# Altium PCB ESP32 PCB.PcbDoc
Units mm, origin at the board's own origin, x right, y up, seen from the top; angles counter-clockwise.
Board outline 29.05 x 62.8 mm, 2 copper layers (Top Layer, Bottom Layer); 49 components, 66 nets, 272 pads, 93 vias.
Unrouted connection lines stored in the file: 58.
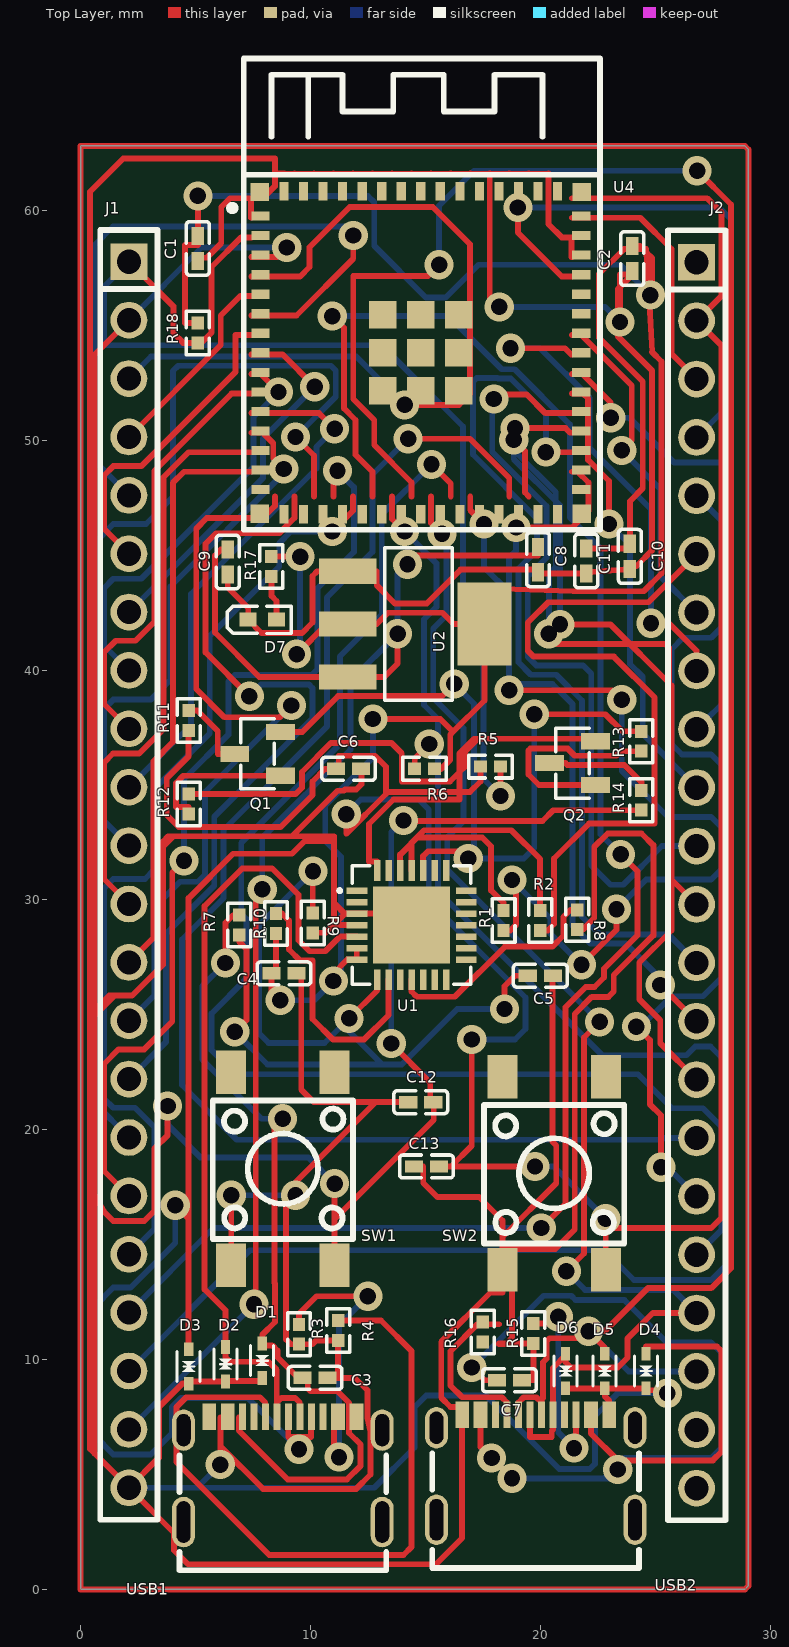
[diagram p0: Top Layer view]
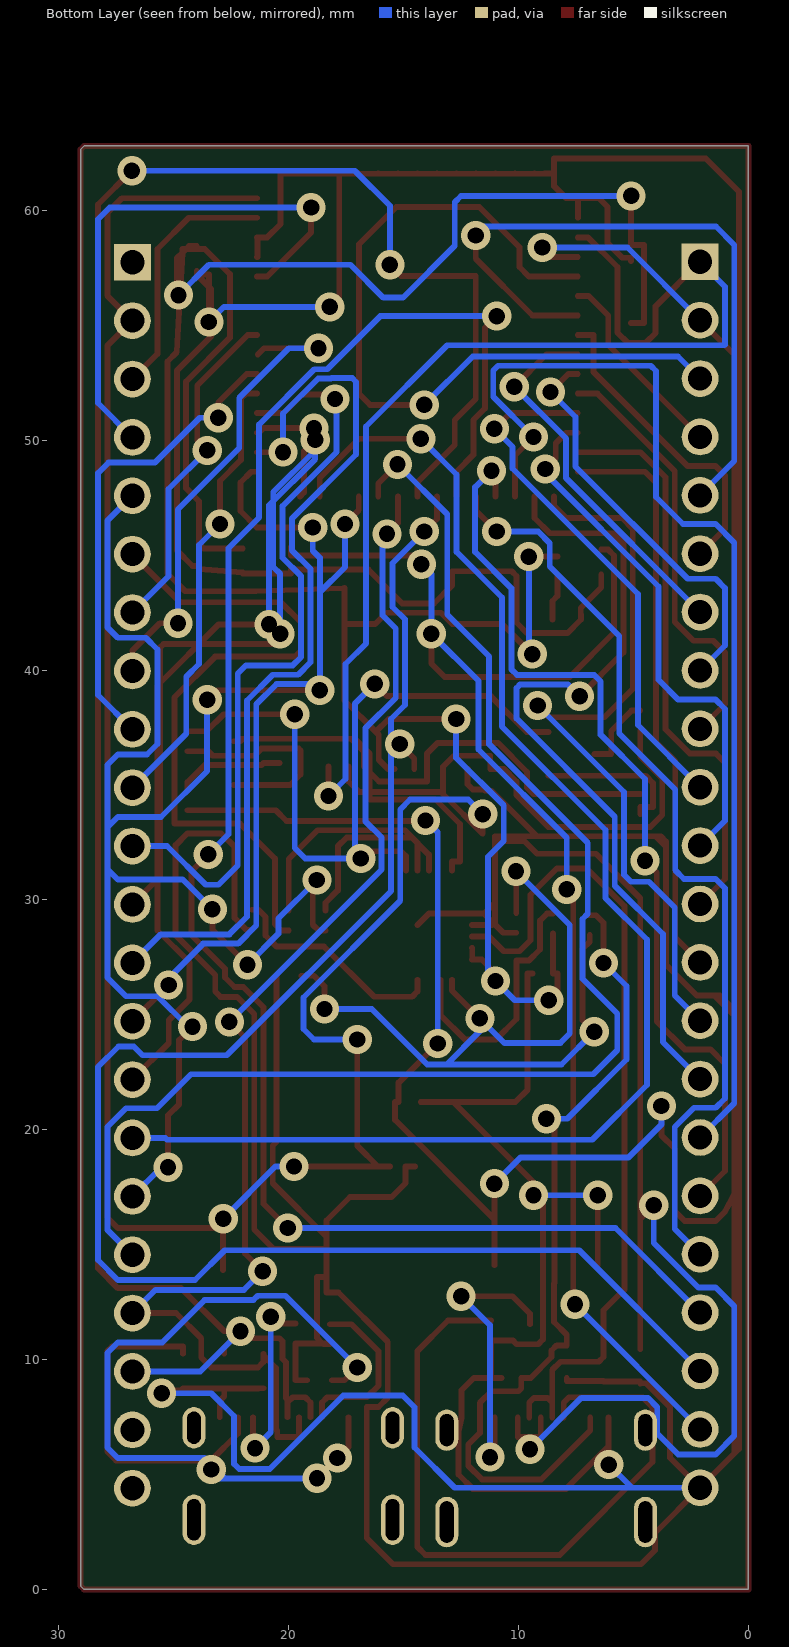
[diagram p1: Bottom Layer view, seen from below]

## Layer stack, top to bottom
Top Solder: solder mask 0.0102, Solder Resist, Dk 3.5
Top Layer: signal copper 0.0356
Dielectric 1: dielectric 0.32, FR-4, Dk 4.8
Bottom Layer: signal copper 0.0356
Bottom Solder: solder mask 0.0102, Solder Resist, Dk 3.5

## Board outline
0,0 28.902,0 29.051,0.149 29.051,62.651 28.902,62.8 0,62.8

## Design rules (kind name [scope] priority, off if disabled: settings)
Clearance Clearance_4 [All] p1: gap=0.15 ignorepadtopadclearanceinfootprint=FALSE
Clearance Clearance_3 [All] p2: gap=0.15 ignorepadtopadclearanceinfootprint=FALSE
Clearance Clearance_2 [All] p3: gap=1.5 ignorepadtopadclearanceinfootprint=FALSE
Clearance Clearance_1 [All] p4: gap=0.2 ignorepadtopadclearanceinfootprint=FALSE
Clearance [All] p5: gap=0.254 ignorepadtopadclearanceinfootprint=FALSE
PolygonConnect [All] p1: connectstyle=Relief reliefconductorwidth=0.254 reliefentries=4 polygonreliefangle="90 Angle" airgapwidth=0.254
RoutingVias [All] p1: holewidth=0.711 width=1.27 viastyle="Through Hole" minholewidth=0.711 minwidth=1.27 maxholewidth=0.711 maxwidth=1.27
SolderMaskExpansion [All] p1: expansion=0.102 istentingtop=FALSE
SupplyNets "Schematic Supply Nets_5" [InNet('VCC_3V3')] p1: voltage=0.000
SupplyNets "Schematic Supply Nets_4" [InNet('GND')] p2: voltage=0.000
SupplyNets "Schematic Supply Nets_3" [InNet('VBUS')] p3: voltage=0.000
SupplyNets "Schematic Supply Nets_2" [InNet('VBUSB')] p4: voltage=0.000
SupplyNets "Schematic Supply Nets_1" [InNet('VCC_5V')] p5: voltage=0.000
SupplyNets "Schematic Supply Nets" [InNet('ESP_3V3')] p6: voltage=0.000
Width [All] p1: maxlimit=0.254 minlimit=0.254 preferedwidth=0.254
30 further rules are at their usual default settings.

## Classes and differential pairs
component class "ESP32 Sheet": C1 C2 C3 C4 C5 C6 C8 C9 C10 C11 C12 C13 D1 D2 D3 D5 D6 D7 J1 J2 Q1 Q2 R1 R2 R4 R5 R6 R7 R8 R9 R10 R11 R12 R13 R14 R15 R16 R17 R18 SW1 U1 U2 U4 USB1 USB2

## Components (designator, comment, footprint, x,y, rotation, side; value= is the part's Value field where it differs from the comment)
C1 "10uF/25V(20%)" C0402 5.1,58.345 r90 top value=100nF
C2 "0.1uF/50V(10%)" C0402 24,57.9 r90 top value=100nF
C3 "100nF/50V" C0402 10.2,9.2 r0 top value=100nF
C4 "10uF/25V(20%)" C0402 8.845,26.8 r0 top value=100nF
C5 "1uF/16V(10%)" C0402 20,26.7 r0 top value=100nF
C6 "1uF/16V(10%)" C0402 11.655,35.7 r0 top value=100nF
C7 "100nF/50V" C0402 18.655,9.1 r0 top value=100nF
C8 "0.1uF/50V(10%)" C0402 19.9,44.8 r90 top value=100nF
C9 "0.1uF/50V(10%)" C0402 6.4,44.7 r90 top value=100nF
C10 "0.1uF/50V(10%)" C0402 23.9,44.945 r90 top value=100nF
C11 "0.1uF/50V(10%)" C0402 22,44.745 r90 top value=100nF
C12 "0.1uF/50V(10%)(NC)" C0402 14.8,21.2 r0 top value=100nF
C13 "0.1uF/50V(10%)(NC)" C0402 15.045,18.4 r0 top value=100nF
D1 "LESD5D5.0CT1G" SOD-523_L1.2-W0.8-LS1.6-BI 7.9,9.95 r90 top
D2 "LESD5D5.0CT1G" SOD-523_L1.2-W0.8-LS1.6-BI 6.3,9.8 r90 top
D3 "LESD5D5.0CT1G" SOD-523_L1.2-W0.8-LS1.6-BI 4.7,9.7 r90 top
D4 "LESD5D5.0CT1G" SOD-523_L1.2-W0.8-LS1.6-BI 24.6,9.5 r90 top
D5 "LESD5D5.0CT1G" SOD-523_L1.2-W0.8-LS1.6-BI 22.8,9.5 r90 top
D6 "LESD5D5.0CT1G" SOD-523_L1.2-W0.8-LS1.6-BI 21.1,9.5 r90 top
D7 "RED LED" LED0402-R-RD 7.9,42.2 r0 top
J1 "X6511WV-22H-C60D30" HDR-TH_22P-P2.54-V-M 2.1,31.09 r270 top
J2 "X6511WV-22H-C60D30" HDR-TH_22P-P2.54-V-M 26.8,31.07 r270 top
Q1 "L8050QLT1G" SOT-23-3_L2.9-W1.3-P1.90-LS2.4-BR 7.7,36.35 r0 top
Q2 "L8050QLT1G" SOT-23-3_L2.9-W1.3-P1.90-LS2.4-BR 21.4,35.95 r0 top
R1 "0(1%)" R0402 18.4,29.1 r90 top value=10kΩ
R2 "0(1%)" R0402 19.993,29.1 r90 top value=10kΩ
R3 "5K1" R0402 9.5,11.1 r90 top value=10kΩ
R4 "5K1" R0402 11.2,11.267 r90 top value=10kΩ
R5 "10k(1%)" R0402 17.833,35.8 r0 top value=10kΩ
R6 "10k(1%)" R0402 14.967,35.7 r0 top value=10kΩ
R7 "22.1K(1%)" R0402 6.9,28.9 r90 top value=10kΩ
R8 "10K(1%)(NC)" R0402 21.6,29.133 r90 top value=10kΩ
R9 "47.5K(1%)" R0402 10.1,29 r90 top value=10kΩ
R10 "1K(1%)" R0402 8.5,28.967 r90 top value=10kΩ
R11 "0(1%)" R0402 4.7,37.8 r90 top value=10kΩ
R12 "10K(1%)" R0402 4.7,34.167 r90 top value=10kΩ
R13 "10K(1%)" R0402 24.4,36.9 r90 top value=10kΩ
R14 "0(1%)" R0402 24.4,34.333 r90 top value=10kΩ
R15 "5K1" R0402 19.7,11.133 r90 top value=10kΩ
R16 "5K1" R0402 17.5,11.2 r90 top value=10kΩ
R17 "5.1k(1%)" R0402 8.3,44.5 r90 top value=10kΩ
R18 "0(1%)" R0402 5.1,54.667 r90 top value=10kΩ
SW1 "PTS645SL50SMTR92LFS" KEY-SMD_4P-L6.0-W6.0-P4.50-LS9.0 8.8,18.3 r90 top
SW2 "PTS645SL50SMTR92LFS" KEY-SMD_4P-L6.0-W6.0-P4.50-LS9.0 20.6,18.1 r90 top
U1 "CP2102N-A02-GQFN28" QFN-28_L5.0-W5.0-P0.50-TL-EP3.3 14.4,28.9 r0 top
U2 "SGM2212-3.3XKC3G/TR" SOT-223-3_L6.5-W3.4-P2.30-LS7.0-BR 14.6,42 r180 top
U4 "2.4GHz" BULETM-SMD_ESP32-S3-MINI-1-N8 14.8,53.8 r0 top
USB1 "2171790001" USB-C-SMD_2171790001 8.8,4.2 r0 top
USB2 "2171790001" USB-C-SMD_2171790001 19.8,4.3 r0 top

## Footprints (in the part's own frame and the unit in brackets; to place one, negate y for a bottom-side part, rotate by r counter-clockwise, add the part's x,y. Pads: shape width x height; smd on the part's side, far side on the other; paste and mask are expansions set on the pad)
BULETM-SMD_ESP32-S3-MINI-1-N8 [mm]
  rect 0.8x0.4 smd paste+0 mask+0.05: 1(-6.975,5.95) 2(-6.975,5.1) 3(-6.975,4.25) 4(-6.975,3.4) 5(-6.975,2.55) 6(-6.975,1.7) 7(-6.975,0.85) 8(-6.975,0) 9(-6.975,-0.85) 10(-6.975,-1.7) 11(-6.975,-2.55) 12(-6.975,-3.4) 13(-6.975,-4.25) 14(-6.975,-5.1) 15(-6.975,-5.95) 31(6.975,-5.95) 32(6.975,-5.1) 33(6.975,-4.25) 34(6.975,-3.4) 35(6.975,-2.55) 36(6.975,-1.7) 37(6.975,-0.85) 38(6.975,0) 39(6.975,0.85) 40(6.975,1.7) 41(6.975,2.55) 42(6.975,3.4) 43(6.975,4.25) 44(6.975,5.1) 45(6.975,5.95)
  rect 0.4x0.8 smd paste+0 mask+0.05: 16(-5.95,-7.025) 17(-5.1,-7.025) 18(-4.25,-7.025) 19(-3.4,-7.025) 20(-2.55,-7.025) 21(-1.7,-7.025) 22(-0.85,-7.025) 23(0,-7.025) 24(0.85,-7.025) 25(1.7,-7.025) 26(2.55,-7.025) 27(3.4,-7.025) 28(4.25,-7.025) 29(5.1,-7.025) 30(5.95,-7.025) 46(5.95,7.025) 47(5.1,7.025) 48(4.25,7.025) 49(3.4,7.025) 50(2.55,7.025) 51(1.7,7.025) 52(0.85,7.025) 53(0,7.025) 54(-0.85,7.025) 55(-1.7,7.025) 56(-2.55,7.025) 57(-3.4,7.025) 58(-4.25,7.025) 59(-5.1,7.025) 60(-5.95,7.025)
  rect 0.8x0.8 smd paste+0 mask+0.05: GND(-7,-7) GND(-7,7) GND(7,-7) GND(7,7)
  rect 1.2x1.2 smd paste+0 mask+0.05: GND(-1.65,-1.65) GND(-1.65,0) GND(-1.65,1.65) GND(0,-1.65) GND(0,0) GND(0,1.65) GND(1.65,-1.65) GND(1.65,0) GND(1.65,1.65)
  silkscreen extent -8.34,-7.7 7.8,12.8, body extent -7.7,-7.58 7.7,12.92, height 2.55
C0402 [mm]
  rect 0.79x0.54 smd paste-100 mask+0.051: 1(-0.545,0) 2(0.545,0)
  silkscreen extent -1.17,-0.5 1.17,0.5, body extent -0.8,-0.33 0.8,0.33, height 0.53
HDR-TH_22P-P2.54-V-M [mm]
  rect 1.6x1.6 hole 1.05: 1(-26.67,0)
  round 1.6 hole 1.05: 2(-24.13,0) 3(-21.59,0) 4(-19.05,0) 5(-16.51,0) 6(-13.97,0) 7(-11.43,0) 8(-8.89,0) 9(-6.35,0) 10(-3.81,0) 11(-1.27,0) 12(1.27,0) 13(3.81,0) 14(6.35,0) 15(8.89,0) 16(11.43,0) 17(13.97,0) 18(16.51,0) 19(19.05,0) 20(21.59,0) 21(24.13,0) 22(26.67,0)
  silkscreen extent -28.06,-1.25 28.06,1.25, body extent -27.94,-1.25 27.94,1.25, height 3
KEY-SMD_4P-L6.0-W6.0-P4.50-LS9.0 [mm]
  rect 1.9x1.3 smd: 1(-4.2,2.25) 2(4.2,2.25) 3(-4.2,-2.25) 4(4.2,-2.25)
  silkscreen extent -3.05,-3.05 2.98,3.05, body extent -3.84,-2.95 3.67,3.05, height 4.7
LED0402-R-RD [mm]
  rect 0.75x0.6 smd: 1(0.623,0) 2(-0.623,0)
  silkscreen extent -1.51,-0.61 1.26,0.58, body extent -0.8,-0.4 0.8,0.4, height 0.53
QFN-28_L5.0-W5.0-P0.50-TL-EP3.3 [mm]
  rect 0.905x0.28 smd paste-100 mask+0.051: 1(-2.377,1.5) 2(-2.377,1) 3(-2.377,0.5) 4(-2.377,0) 5(-2.377,-0.5) 6(-2.377,-1) 7(-2.377,-1.5) 15(2.377,-1.5) 16(2.377,-1) 17(2.377,-0.5) 18(2.377,0) 19(2.377,0.5) 20(2.377,1) 21(2.377,1.5)
  rect 0.28x0.905 smd paste-100 mask+0.051: 8(-1.5,-2.377) 9(-1,-2.377) 10(-0.5,-2.377) 11(0,-2.377) 12(0.5,-2.377) 13(1,-2.377) 14(1.5,-2.377) 22(1.5,2.377) 23(1,2.377) 24(0.5,2.377) 25(0,2.377) 26(-0.5,2.377) 27(-1,2.377) 28(-1.5,2.377)
  rect 3.35x3.35 smd paste-100 mask+0.051: 29(0,0)
  silkscreen extent -3.2,-2.58 2.58,2.58, body extent -2.46,-2.5 2.54,2.5, height 1
R0402 [mm]
  rect 0.566x0.54 smd paste-100 mask+0.051: 1(-0.433,0) 2(0.433,0)
  silkscreen extent -0.94,-0.5 0.94,0.5, body extent -0.5,-0.5 0.5,0.5, height 0.36
SOD-523_L1.2-W0.8-LS1.6-BI [mm]
  rect 0.6x0.4 smd paste+0 mask+0.051: 1(-0.75,0) 2(0.75,0)
  silkscreen extent -0.65,-0.5 0.65,0.5, body extent -0.85,-0.45 0.85,0.45, height 0.76
SOT-23-3_L2.9-W1.3-P1.90-LS2.4-BR [mm]
  rect 1.25x0.7 smd: 1(1,-0.95) 2(1,0.95) 3(-1,0)
  silkscreen extent -0.73,-1.53 0.73,1.53, body extent -1.42,-1.5 1.42,1.5, height 1.2
SOT-223-3_L6.5-W3.4-P2.30-LS7.0-BR [mm]
  rect 2.5x1.1 smd: 1(2.97,-2.3) 2(2.97,0) 3(2.97,2.3)
  rect 2.34x3.6 smd: 4(-2.97,0)
  silkscreen extent -1.57,-3.33 1.37,3.33, body extent -3.66,-3.25 3.71,3.25, height 1.8
USB-C-SMD_2171790001 [mm]
  oval 1x2.2 hole 0.6 slot 1.8 at 90 deg paste-2539.97 mask+0.05: 1(-4.32,-1.271)
  oval 1x1.8 hole 0.6 slot 1.4 at 90 deg paste-2539.97 mask+0.05: 1(-4.32,2.728) 1(4.32,2.728)
  oval 1x2.2 hole 0.6 slot 1.8 at 90 deg copper offset 0,0 paste-2539.97 mask+0.05: 1(4.32,-1.271)
  rect 0.6x1.15 smd paste-100 mask+0.05: A1B12(-3.2,3.303) A4B9(-2.4,3.303) B1A12(3.2,3.303) B4A9(2.4,3.303)
  rect 0.3x1.15 smd paste-100 mask+0.05: A5(-1.25,3.303) A6(-0.25,3.303) A7(0.25,3.303) A8(1.25,3.303) B5(1.75,3.303) B6(0.75,3.303) B7(-0.75,3.303) B8(-1.75,3.303)
  silkscreen extent -4.5,-3.37 4.5,1.62, body extent -4.47,-4.06 4.47,3.84, height 3.23

## Part data
C1 C2 C3 C4 C5 C6 C7 C8 C9 C10 C11 C12 C13: library part CL05B104KB54PNC, JLCPCB Part Class="Basic Part", LCSC Part Name="100nF ±10% 50V", Manufacturer=SAMSUNG(三星), Tolerance=±10%, Add into BOM=yes, Convert to PCB=yes, Datasheet=https://atta.szlcsc.com/upload/public/pdf/source/20160218/1457707763339.pdf, Device=CL05B104KB54PNC, Manufacturer Part=CL05B104KB54PNC, Supplier=LCSC, Supplier Footprint=0402, Supplier Part=C307331, Symbol=CL05B104KB54PNC
D1 D2 D3 D4 D5 D6: library part LESD5D5.0CT1G_C5199850, JLCPCB Part Class="Extended Part", Manufacturer=UMW(友台半导体), Add into BOM=Yes, Contributor=lcsc, Convert to PCB=Yes, Manufacturer Part=LESD5D5.0CT1G, spicePre=D, spiceSymbolName=LESD5D5.0CT1G_C5199850, Supplier=LCSC, Supplier Part=C5199850
D7: library part 16-213SDRC/S530-A3/TR8, Emitted Color=Red, Forward Current=20mA, Forward Voltage (VF)=2V, JLCPCB Part Class="Extended Part", LCSC Part Name=红灯, Lens Color="Colorless transparent lens", Manufacturer=EVERLIGHT(亿光), Add into BOM=yes, Convert to PCB=yes, Datasheet=https://atta.szlcsc.com/upload/public/pdf/source/20180423/C71911_C51F85E8EEDEC443F292EE02E8E26750.pdf, Device=16-213SDRC/S530-A3/TR8, Dominant Wavelength=639nm, Luminous Intensity=43mcd, Manufacturer Part=16-213SDRC/S530-A3/TR8, Peak Wavelength=650nm, Supplier=LCSC, Supplier Footprint=0402, Supplier Part=C71911, Symbol=16-213/SDRC/S530-A3/TR8, Viewing Angle=120°
J1 J2: Color=Black, Current Rating=3A, JLCPCB Part Class="Extended Part", LCSC Part Name="1x22P 间距:2.54mm 方针", Manufacturer="XKB Connection(中国星坤)", Operating Temperature=-40℃~+105℃, Voltage Rating (Max)=250V, Add into BOM=yes, Circluar Pins/Square Pins=Policy, Contact Material=Brass, Contact Plating=Gold, Convert to PCB=yes, Datasheet=https://atta.szlcsc.com/upload/public/pdf/source/20221108/2FDDF9C694C8EDC81165E23F2EAAE597.pdf, Device=X6511WV-22H-C60D30, Insulation Height=2.5mm, Length of End Connection Pin=-, Length of Mating Pin=-, Manufacturer Part=X6511WV-22H-C60D30, Number of Pins=22P, Number of Rows="Single Row", Pin Structure=1x22P, Pitch=2.54mm, Row Spacing=2.54mm, Supplier=LCSC, Supplier Footprint=插件,P=2.54mm, Supplier Part=C725954, Symbol=X6511WV-22H-C30D60
Q1 Q2: Collector Cut-Off Current (Icbo)=150nA, Collector-Emitter Saturation Voltage (VCE(sat)@Ic,Ib)=500mV@800mA,80mA, DC Current Gain (hFE@Ic,Vce)=100@100mA,1V, JLCPCB Part Class="Extended Part", LCSC Part Name="NPN 电流:800mA 耐压:25V", Manufacturer=LRC(乐山无线电), Operating Temperature=-55℃~+150℃, Add into BOM=yes, Convert to PCB=yes, Datasheet=https://atta.szlcsc.com/upload/public/pdf/source/20150518/1457707314424.pdf, Device=L8050QLT1G, Manufacturer Part=L8050QLT1G, Supplier=LCSC, Supplier Footprint=SOT-23, Supplier Part=C49581, Symbol=L8050QLT1G
R1 R2 R3 R4 R5 R6 R7 R8 R9 R10 R11 R12 R13 R14 R15 R16 R17 R18: library part AC0402FR-0710KL, JLCPCB Part Class="Extended Part", LCSC Part Name="厚膜电阻 10kΩ ±1% 62.5mW", Manufacturer=YAGEO(国巨), Operating Temperature Range=-55℃~+155℃, Temperature Coefficient=±100ppm/℃, Tolerance=±1%, Add into BOM=yes, Convert to PCB=yes, Datasheet=https://atta.szlcsc.com/upload/public/pdf/source/20180927/C229861_4ABDC471507C1ED6AFB4BA66AFC8620A.pdf, Device=AC0402FR-0710KL, Manufacturer Part=AC0402FR-0710KL, Supplier=LCSC, Supplier Footprint=0402, Supplier Part=C144807, Symbol=AC0402FR-0710KL, Type="Thick Film Resistors"
SW1 SW2: Contact Current=50mA, JLCPCB Part Class="Extended Part", LCSC Part Name="6*6*1.55mm 立贴 轻触开关", Manufacturer=C&K, Operating Force=130gf, Operating Temperature=-40℃~+85℃, Voltage Rating (DC)=12V, Actuator Style="Round Button", Add into BOM=yes, Circuit=SPST, Convert to PCB=yes, Datasheet=https://atta.szlcsc.com/upload/public/pdf/source/20190108/C285530_E89B379DE8DD14E424006A6061D0203A.pdf, Device=PTS645SL50SMTR92LFS, Manufacturer Part=PTS645SL50SMTR92LFS, Mechanical Life=-, Mounting Style="Brick nogging", Pin Style="Gull Wing", Supplier=LCSC, Supplier Footprint=SMD, Supplier Part=C221877, Switch Height=1.55mm, Switch Length=6mm, Switch Width=6mm, Symbol=PTS645SL50SMTR92LFS, With Lamp=-
U1: JLCPCB Part Class="Extended Part", Manufacturer="SKYWORKS/SILICON LABS(芯科)", Operating Temperature=-40℃~+85℃@(Ta), Voltage - Supply=3V~3.6V, Add into BOM=yes, Applications Function="USB to UART", Convert to PCB=yes, Datasheet=https://atta.szlcsc.com/upload/public/pdf/source/20201204/C964632_F2B790CC23A72455AEF523510305B30A.pdf, Device=CP2102N-A02-GQFN28, LCSC Part Name=CP2102N-A02-GQFN28, Manufacturer Part=CP2102N-A02-GQFN28, Protocol=-, Supplier=LCSC, Supplier Footprint=QFN-28-EP(5x5), Supplier Part=C1550553, Symbol=CP2102N-A02-GQFN28
U2: library part SGM2212-3.3XKC3G/TR_C3294699, JLCPCB Part Class="Extended Part", Manufacturer=SGMICRO(圣邦微), Add into BOM=yes, Convert to PCB=yes, Device=SGM2212-3.3XKC3G/TR_C3294699, LCSC Part Name=SGM2212-3.3XKC3G/TR, Manufacturer Part=SGM2212-3.3XKC3G/TR, Supplier=LCSC, Supplier Footprint=SOT-223-3, Supplier Part=C3294699, Symbol=SGM2212-3.3XKC3G/TR_C3294699
U4: library part ESP32-S3-MINI-1-N8, JLCPCB Part Class="Extended Part", Manufacturer=ESPRESSIF(乐鑫), Operating Temperature=-, Output Power=20.5dBm, Add into BOM=yes, Antenna Type=-, Convert to PCB=yes, Core Processor="ESP32-S3FN8 Chip", Datasheet=https://atta.szlcsc.com/upload/public/pdf/source/20220425/7F117D7A09F85946280540FD9EFDF9F3.pdf, Device=ESP32-S3-MINI-1-N8, LCSC Part Name=ESP32-S3-MINI-1-N8, Manufacturer Part=ESP32-S3-MINI-1-N8, Operating Voltage=-, Receive  Current=-, Send  Current=-, Sensitivity=-, Supplier=LCSC, Supplier Footprint=SMD, Supplier Part=C2913206, Support Interface=I2C；GPIO；SPI；PWM；ADC；UART；USB；I2S, Symbol=ESP32-S3-MINI-1-N8, Wireless Standard=-
USB1 USB2: JLCPCB Part Class="Extended Part", Manufacturer=MOLEX, Add into BOM=yes, Convert to PCB=yes, Datasheet=https://www.molex.com/content/dam/molex/molex-dot-com/products/automated/en-us/salesdrawingpdf/217/217179/2171790001_sd.pdf?inline\, Device=2171790001, LCSC Part Name=2171790001, Manufacturer Part=2171790001, Supplier=LCSC, Supplier Footprint=SMD, Supplier Part=C3197684, Symbol=2171790001

## Via types
v1: diameter 1.27, hole 0.711, Top Layer to Bottom Layer, 93 vias

## Nets (pads, with @x,y where several pads share a name; then routed paths per layer and width w, separated by ;. In a path a pad name is that pad's centre, name@x,y a point inside that pad or via, vN(x,y) a via of type N, cw(c..) or ccw(c..) an arc to the next point about the centre after c; other vN are vias at no path point)
ESP_3V3: J1.1 R5.2 R18.1 U4.3 | length 50.2
  Top Layer w0.254: J1.1 4.033,55.827 4.033,54.661 4.46,54.234 R18.1 5.245,54.234 5.69,54.679 5.69,57.531 6.984,58.825 7.425,58.825 ; v1(18.266,34.516) R5.2
  Bottom Layer w0.254: J1.1 1.016,56.676 1.016,54.153 1.041,54.127 13.104,54.127 16.637,50.594 16.637,41.148 17.526,40.259 17.526,35.255 v1(18.266,34.516)
GND: C1.1 C2.1 C3.2 C4.2 C5.2 C6.2 C7.2 C8.1 C9.1 C10.1 C11.1 C12.1 C13.1 D1.1 D2.1 D3.1 D4.1 D5.1 D6.1 D7.2 J1.22 R3.1 R4.1 R8.1 R9.1 R15.1 R16.1 SW1.1 SW2.1 U1.3 U1.29 U2.1 U4.1 U4.2 U4.42 U4.43 U4.46 U4.47 U4.48 U4.49 U4.50 U4.51 U4.52 U4.53 U4.54 U4.55 U4.56 U4.57 U4.58 U4.59 U4.60 USB1.A1B12 USB1.B1A12 USB2.A1B12 USB2.B1A12 | length 375.7
  Top Layer w0.254: D3.1 D3.1@4.7,8.966 ; C1.1 5.1,57.937 5.486,57.937 6.121,58.572 6.121,60.147 6.499,60.525 7.417,60.525 ; v1(6.071,5.428) 6.08,5.437 6.08,6.231 ; 6.08,7.475 6.08,6.231 ; C9.1 6.4,43.586 7.29,42.697 D7.2 7.283,42.2 7.283,42.194 7.872,41.605 9.627,41.605 10.084,42.062 10.084,44.094 10.289,44.3 U2.1 12.88,44.3 12.88,43.688 13.672,42.896 15.06,42.896 16.531,44.367 19.9,44.367 C8.1 19.9,44.2 C11.1 22,44.247 C10.1 23.9,44.526 24.181,44.526 24.864,45.21 24.864,53.023 23.368,54.519 23.368,56.569 23.472,56.673 ; SW1.1 v1(6.55,17.146) ; 7.425,59.675 7.417,59.675 7.417,60.525 ; D1.1 7.9,9.068 6.3,9.068 D2.1 6.3,9.048 4.7,9.048 D3.1@4.7,8.966 ; 9.3,61.6 9.3,61.595 ; v1(9.347,17.146) v1@9.068,17.425 ; C4.2 9.601,26.8 9.601,21.742 10.144,21.2 12.843,21.2 ; R9.1 10.668,28.567 11.501,29.4 ; 10.15,61.6 10.15,61.595 ; C3.2 11.2,9.2 ; 11,61.6 11,61.595 ; 11.85,61.6 11.85,61.595 ; C6.2 12.217,35.7 12.217,35.027 11.989,34.798 11.506,34.798 11.453,34.745 11.176,34.745 9.197,32.766 ; 12.7,61.6 12.7,61.595 ; 13.55,61.6 13.55,61.595 ; C12.1 12.843,21.2 ; U1.29 13.9,29.4 U1.3 11.501,29.4 ; 14.4,61.6 14.4,61.595 ; C13.1 14.91,18.4 14.91,17.678 15.519,17.069 17.334,17.069 18.35,16.053 18.35,15.327 ; 15.25,61.6 15.25,61.595 ; 16.1,61.6 16.1,61.595 ; 16.95,61.6 16.95,61.595 ; 17.8,61.6 17.8,61.595 ; v1(18.211,55.799) 17.8,56.21 17.8,61.595 ; 18.65,61.6 18.65,61.595 ; C7.2 19.7,9.1 R15.1 18.524,10.7 ; 19.5,61.6 19.5,61.595 ; 20.35,61.6 20.35,61.595 ; C5.2 20.523,26.7 20.523,19.482 20.692,19.313 20.692,17.669 18.35,15.327 ; D6.1 21.311,8.75 21.324,8.738 D5.1@22.8,8.738 ; 21.375,57.975 21.361,57.975 21.361,58.825 ; 21.375,58.825 21.361,58.825 ; R8.1 21.844,28.7 22.35,29.206 22.35,32.309 22.931,32.891 24.407,32.891 24.917,32.38 24.917,28.454 23.195,26.731 23.195,26.01 22.965,25.779 22.243,25.779 21.5,25.036 21.5,15.658 20.65,14.808 SW2.1@18.35,14.808 ; D5.1 D5.1@22.8,8.738 ; USB2.B1A12@23,7.487 23,8.204 22.8,8.404 D5.1@22.8,8.738 ; v1(23.47,55.143) 23.472,55.146 23.472,56.673 ; C2.1 C2.1@24,57.201 ; D4.1 D4.1@24.6,8.738 ; v1(25.527,8.534) 25.4,8.661 24.6,8.661 D4.1@24.6,8.738 ; 0.406,6.114 0.406,24.994 ; 0.406,6.114 0.61,5.91 ; 0.406,6.114 0.61,6.114 ; 0.406,24.994 0.406,60.808 1.854,62.255 8.45,62.255 8.45,61.6 ; 0.406,24.994 1.245,25.832 1.473,25.832 ; 0.61,5.91 0.61,6.114 ; 0.61,5.91 J1.22 ; 0.61,6.114 0.61,24.968 1.473,25.832 ; 1.473,25.832 2.235,25.832 ; J1.22 4.064,2.456 4.064,1.702 4.674,1.092 15.457,1.092 16.6,2.235 16.6,7.487 16.6,7.937 16.092,7.937 15.688,8.341 15.688,10.77 17.833,12.915 18.35,12.915 SW2.1@18.35,13.589 ; J1.22 3.404,5.724 3.404,7.925 4.445,8.966 D3.1@4.7,8.966 ; 2.235,25.832 3.581,27.178 ; 2.235,25.832 3.581,27.178 ; 3.581,27.178 3.581,32.309 ; 3.581,32.309 3.581,32.537 3.81,32.766 4.038,32.766 ; 3.581,32.309 4.038,32.766 ; 4.038,32.766 9.197,32.766 ; 6.08,6.231 7.937,4.374 11.989,4.374 12.613,4.998 12.613,6.875 12.48,7.475 12.48,8.661 11.941,9.2 11.2,9.2 ; 7.417,60.525 7.425,60.525 7.925,60.525 8.45,61.05 8.45,61.6 ; 8.45,61.6 8.86,61.6 8.865,61.595 9.3,61.595 ; v1@9.068,17.425 12.843,21.2 ; v1@9.068,17.425 8.941,17.297 8.941,17.146 8.941,10.87 9.144,10.667 R3.1 10.084,10.667 10.251,10.834 11.2,10.834 11.2,9.2 ; 9.197,32.766 11.021,32.766 11.021,29.87 11.492,29.4 11.501,29.4 ; 9.3,61.595 10.15,61.595 ; 10.15,61.595 11,61.595 ; 11,61.595 11.85,61.595 ; 11.85,61.595 12.7,61.595 ; 12.7,61.595 13.55,61.595 ; 13.55,61.595 14.4,61.595 ; 14.4,61.595 15.25,61.595 ; 15.25,61.595 16.1,61.595 ; 16.1,61.595 16.95,61.595 ; 16.95,61.595 17.8,61.595 ; 17.8,61.595 18.65,61.595 ; SW2.1@18.35,13.589 18.771,13.589 18.771,10.947 18.524,10.7 ; SW2.1@18.35,13.589 SW2.1 SW2.1@18.35,14.808 ; SW2.1@18.35,14.808 18.35,15.327 ; 18.524,10.7 18.491,10.667 18.2,10.667 18.2,10.7 18.524,10.7 ; 18.65,61.595 19.5,61.595 ; 19.5,61.595 20.35,61.595 ; 20.35,61.595 20.35,59.405 20.93,58.825 21.361,58.825 ; D5.1@22.8,8.738 D4.1@24.6,8.738 ; 23.472,56.673 23.472,57.201 C2.1@24,57.201 ; 23.472,56.673 C2.1@24,57.201
  Bottom Layer w0.254: J1.22 5.063,4.42 ; v1(6.071,5.428) 5.063,4.42 ; v1(6.55,17.146) v1(9.347,17.146) ; v1(18.211,55.799) 22.814,55.799 v1(23.47,55.143) ; v1(25.527,8.534) 23.368,8.534 22.375,7.541 22.375,5.461 22.149,5.235 20.826,5.235 17.628,8.433 15.037,8.433 14.529,7.925 14.529,6.172 12.777,4.42 5.063,4.42
NetC5_1: C5.1 R7.1 R9.2 U1.8 | length 39.2
  Top Layer w0.254: v1(6.706,24.257) 7.211,24.763 7.211,27.861 6.9,28.172 R7.1 ; R9.2 10.1,31.233 v1(10.109,31.242) ; v1(11.681,24.841) 12.9,26.06 U1.8 ; v1(18.44,25.248) 18.44,26.243 18.898,26.7 C5.1
  Bottom Layer w0.254: v1(6.706,24.257) 8.126,22.837 13.124,22.837 ; v1(10.109,31.242) 7.772,28.905 7.772,24.181 8.179,23.774 10.614,23.774 v1(11.681,24.841) 11.681,24.28 13.124,22.837 ; v1(18.44,25.248) 16.384,25.248 13.974,22.837 13.124,22.837
NetC6_1: C6.1 C13.2 J2.2 R5.1 R11.1 SW2.3 U4.45 | length 116.4
  Top Layer w0.254: R11.1@4.7,37.367 4.7,36.247 3.749,35.296 3.749,33.691 4.267,33.173 8.702,33.173 10.084,34.555 10.084,35.154 10.63,35.7 C6.1 11.227,35.7 11.227,36.271 12.802,36.271 13.281,35.791 13.281,34.697 ; v1(11.557,33.731) 11.557,32.88 13.281,34.605 13.281,34.697 ; C13.2 16.114,18.4 ; v1(17.018,23.927) 17.018,19.304 16.114,18.4 ; R5.1 17.4,35.154 16.944,34.697 13.281,34.697 ; v1(19.766,18.4) 16.114,18.4 ; 21.375,60.525 27.257,60.525 27.889,59.893 27.889,56.289 J2.2 27.889,54.111 27.889,16.18 27.432,15.723 23.256,15.723 v1(22.85,16.129) SW2.3
  Bottom Layer w0.254: v1(11.557,33.731) 12.19,34.364 14.716,34.364 15.146,33.934 15.146,29.965 19.355,25.756 19.355,24.384 18.898,23.927 v1(17.018,23.927) ; v1(19.766,18.4) 20.579,18.4 v1(22.85,16.129)
NetC12_2: C12.2 J1.2 R14.1 SW1.3 U4.4 | length 100.2
  Top Layer w0.254: J1.2 0.61,53.73 0.61,17.17 1.016,16.434 1.422,16.027 2.769,16.027 3.2,16.459 3.2,19.177 3.785,19.761 v1(3.785,21.031) ; 7.425,57.975 8.56,57.975 v1(8.966,58.382) ; SW1.3 11.05,16.105 ; v1(11.05,17.653) 11.05,16.105 ; v1(13.513,23.749) 15.215,22.047 15.215,21.2 C12.2 15.367,21.2 15.367,20.422 11.05,16.105 ; v1(14.046,33.449) 14.067,33.429 20.091,33.429 20.563,33.9 R14.1
  Bottom Layer w0.254: J1.2 5.262,58.382 v1(8.966,58.382) ; v1(3.785,21.031) 3.785,20.218 5.207,18.796 9.907,18.796 v1(11.05,17.653) ; v1(13.513,23.749) 13.513,32.941 14.021,33.449 v1(14.046,33.449)
NetD2_2: D2.2 U1.5 USB1.A7 USB1.B7 | length 36.6
  Top Layer w0.254: 8.53,7.475 8.53,8.128 ; 9.53,7.475 9.53,8.128 9.327,8.331 8.733,8.331 8.53,8.128 ; U1.5 11.278,28.4 10.64,27.762 9.957,27.762 9.474,28.245 9.474,30.224 8.331,31.367 7.029,31.367 5.387,29.725 5.387,13.053 6.3,12.14 D2.2 6.3,10.108 6.502,9.906 8.174,9.906 8.53,9.55 8.53,8.128
NetD3_2: D3.2 U1.4 USB1.A6 USB1.B6 | length 59.4
  Top Layer w0.254: v1(4.115,16.713) 4.7,16.128 ; D3.2 4.7,16.128 ; 9.03,7.475 9.03,6.623 v1@9.5,6.623 ; v1(9.5,6.096) v1@9.5,6.623 ; 10.03,7.475 10.03,6.623 v1@9.5,6.623 ; U1.4 11.151,28.9 11.024,29.027 11.024,32.56 9.754,32.56 9.197,32.004 6.629,32.004 4.7,30.075 4.7,16.128
  Bottom Layer w0.254: v1(4.115,16.713) 4.115,15.072 2.175,13.132 1.422,13.132 0.61,12.319 0.61,6.68 1.422,5.867 3.048,5.867 3.962,6.782 3.962,7.925 4.369,8.331 7.264,8.331 v1(9.5,6.096)
NetD5_2: D5.2 J2.20 U4.23 USB2.A7 USB2.B7 | length 98.8
  Top Layer w0.254: 14.4,47.55 14.4,48.158 12.771,49.787 12.771,50.881 11.862,51.791 11.862,57.15 15.113,57.15 v1(15.596,57.633) ; USB2.B7@19.05,7.487 19.05,8.128 19.279,8.357 19.821,8.357 USB2.A7@20.05,8.128 ; USB2.A7@20.05,7.487 USB2.A7@20.05,8.128 ; D5.2 22.8,10.525 v1@22.396,10.929 ; v1(26.822,61.722) 28.296,60.249 28.296,13.97 27.432,13.106 24.68,13.106 22.8,11.227 v1(22.098,11.227) v1@22.396,10.929 ; USB2.A7@20.05,8.128 20.05,8.264 20.117,8.331 20.117,9.881 20.269,10.033 20.269,10.795 20.403,10.929 v1@22.396,10.929
  Bottom Layer w0.254: v1(15.596,57.633) 15.596,60.198 17.12,61.722 v1(26.822,61.722) ; v1(22.098,11.227) 23.845,9.48 J2.20
NetD6_2: D6.2 J2.19 U4.24 USB2.A6 USB2.B6 | length 58.1
  Top Layer w0.254: 15.25,47.55 15.25,46.396 v1(15.723,45.923) ; USB2.A6@19.55,7.487 19.55,6.635 20.498,6.635 20.498,6.907 20.55,6.96 20.55,7.487 20.55,9.635 D6.2@21.1,10.185 ; D6.2 D6.2@21.1,10.185 ; v1(21.133,13.843) 21.904,14.614 21.904,24.012 v1(22.581,24.689) ; J2.19 24.898,12.02 23.8,10.922 23.8,10.084 23.368,9.652 21.336,9.652 21.1,9.888 D6.2@21.1,10.185
  Bottom Layer w0.254: v1(15.723,45.923) 15.921,45.725 15.921,42.379 15.344,41.802 15.344,38.786 16.662,37.468 16.662,33.421 15.954,32.713 15.954,31.316 v1(22.581,24.689) ; v1(21.133,13.843) 21.946,13.03 25.79,13.03 J2.19
NetD7_1: D7.1 R17.1 | length 2
  Top Layer w0.254: R17.1 8.3,43.225 8.523,43.002 D7.1
NetJ1_3: J1.3 U4.5 | length 34.8
  Top Layer w0.254: 7.425,57.125 9.55,57.125 9.957,57.531 9.957,58.395 11.707,60.145 15.319,60.145 16.942,58.522 16.942,52.019 16.459,51.537 v1(14.097,51.537)
  Bottom Layer w0.254: J1.3 3.064,53.644 11.989,53.644 v1(14.097,51.537)
NetJ1_4: J1.4 U4.6 | length 8.6
  Top Layer w0.254: J1.4 6.096,54.136 6.096,55.423 6.948,56.275 7.425,56.275
NetJ1_5: J1.5 U4.7 | length 29.7
  Top Layer w0.254: 7.425,55.425 9.388,55.425 11.862,57.899 v1(11.862,58.903)
  Bottom Layer w0.254: J1.5 0.61,49.09 0.61,58.496 1.407,59.294 11.471,59.294 v1(11.862,58.903)
NetJ1_6: J1.6 U4.8 | length 13.7
  Top Layer w0.254: J1.6 1.016,46.144 1.016,48.463 1.422,48.87 2.642,48.87 6.731,52.959 6.731,54.575 7.425,54.575
NetJ1_7: J1.7 U4.9 | length 16.5
  Top Layer w0.254: 7.425,53.725 8.788,53.725 v1(10.185,52.328)
  Bottom Layer w0.254: J1.7 7.927,48.347 7.927,50.07 v1(10.185,52.328)
NetJ1_8: J1.8 U4.10 | length 17.9
  Top Layer w0.254: 7.425,52.875 7.831,52.875 v1(8.611,52.095)
  Bottom Layer w0.254: J1.8 1.016,41.064 1.016,43.561 1.422,43.967 2.642,43.967 7.523,48.849 7.523,51.008 v1(8.611,52.095)
NetJ1_9: J1.9 U4.11 | length 18.7
  Top Layer w0.254: J1.9 1.016,38.524 1.016,40.767 1.524,41.275 2.384,41.275 3.2,42.091 3.2,48.659 6.567,52.025 7.425,52.025
NetJ1_10: J1.10 U4.12 | length 23.2
  Top Layer w0.254: 7.425,51.175 10.369,51.175 v1(11.049,50.495)
  Bottom Layer w0.254: J1.10 4.805,37.605 4.805,43.307 10.262,48.763 10.262,49.708 v1(11.049,50.495)
NetJ1_11: J1.11 U4.13 | length 23.5
  Top Layer w0.254: 7.425,50.325 7.925,50.325 8.382,49.868 8.382,49.2 v1(8.839,48.743)
  Bottom Layer w0.254: J1.11 1.016,33.444 1.016,38.303 1.422,38.71 3.048,38.71 3.912,39.573 3.912,43.632 8.839,48.559 v1(8.839,48.743)
NetJ1_12: J1.12 U4.14 | length 25
  Top Layer w0.254: J1.12 1.016,30.904 1.016,35.966 1.413,36.363 2.546,36.363 3.604,37.421 3.604,48.387 4.692,49.475 7.425,49.475
NetJ1_13: J1.13 U4.15 | length 25.3
  Top Layer w0.254: J1.13 3.177,28.357 3.177,36.027 4.013,36.863 4.013,48.143 4.496,48.625 7.425,48.625
NetJ1_14: J1.14 U4.16 | length 33.2
  Top Layer w0.254: 8.45,47.55 8.45,47.134 7.925,46.609 5.486,46.609 5.029,46.152 5.029,39.172 6.253,37.948 8.661,37.948 v1(9.169,38.456)
  Bottom Layer w0.254: J1.14 3.2,25.84 3.2,29.667 4.32,30.787 5.105,30.787 5.408,31.09 5.408,34.694 v1(9.169,38.456)
NetJ1_15: J1.15 U4.17 | length 36
  Top Layer w0.254: v1(7.341,38.862) 5.436,40.767 5.436,45.491 5.893,45.949 8.64,45.949 9.3,46.609 9.3,47.55
  Bottom Layer w0.254: J1.15 3.708,23.808 3.708,28.511 5.812,30.615 5.812,33.619 10.081,37.888 10.081,39.218 9.924,39.375 7.853,39.375 v1(7.341,38.862)
NetJ1_16: J1.16 U4.18 | length 50
  Top Layer w0.254: v1(9.347,50.14) 10.15,49.337 10.15,47.55
  Bottom Layer w0.254: J1.16 0.61,21.15 0.61,45.542 1.422,46.355 2.845,46.355 4.013,47.523 4.013,53.01 4.244,53.24 10.895,53.24 11.1,53.035 11.1,51.892 v1(9.347,50.14)
NetJ1_17: J1.17 U4.19 | length 40.6
  Top Layer w0.254: J1.17 1.016,18.204 1.016,22.862 1.649,23.495 2.769,23.495 3.985,24.711 3.985,31.188 v1(4.496,31.699) ; 11,47.55 11,48.49 v1(11.176,48.666)
  Bottom Layer w0.254: v1(4.496,31.699) 4.496,35.255 6.426,37.186 6.426,39.499 6.706,39.779 10.058,39.779 10.31,40.03 10.31,43.559 11.887,45.136 11.887,47.955 v1(11.176,48.666)
NetJ1_18: J1.18 U4.20 | length 41.2
  Top Layer w0.254: v1(10.947,46.025) 11.85,46.927 11.85,47.55
  Bottom Layer w0.254: J1.18 3.2,15.68 3.2,20.117 2.362,20.955 1.422,20.955 1.016,21.361 1.016,30.505 1.422,30.912 2.796,30.912 3.177,31.293 3.177,34.801 5.616,37.24 5.616,41.481 8.638,44.503 8.638,45.519 9.144,46.025 v1(10.947,46.025)
NetJ1_19: J1.19 U4.21 | length 78.5
  Top Layer w0.254: v1(10.947,55.397) 11.455,54.889 11.455,51.384 11.963,50.876 11.963,49.365 12.7,48.629 12.7,47.55 ; v1(20.041,15.723) 21.096,16.778 21.096,25.326 21.974,26.205 22.355,26.205 22.77,26.619 22.77,27 24.232,28.462 24.232,31.242 v1(23.495,31.979)
  Bottom Layer w0.254: J1.19 5.783,15.723 v1(20.041,15.723) ; v1(10.947,55.397) 16.013,55.397 18.322,53.088 18.883,53.088 21.285,50.686 21.285,46.634 22.619,45.3 22.619,32.854 v1(23.495,31.979)
NetJ1_20: J1.20 R6.1 U4.22 | length 74.2
  Top Layer w0.254: 13.55,47.55 13.55,46.572 v1(14.097,46.025) ; R6.1 14.534,36.15 v1(15.164,36.779)
  Bottom Layer w0.254: J1.20 7.357,14.757 22.784,14.757 24.079,13.462 27.432,13.462 28.296,14.326 28.296,22.733 27.407,23.622 26.74,23.622 26.357,23.239 22.689,23.239 15.55,30.378 v1@15.55,36.393 ; v1(14.097,46.025) 15.478,44.644 15.478,42.744 14.94,42.206 14.94,38.476 15.55,37.867 v1@15.55,36.393 ; v1(15.164,36.779) v1@15.55,36.393
NetJ2_3: J2.3 U4.44 | length 11
  Top Layer w0.254: 21.375,59.675 24.348,59.675 25.705,58.318 25.705,53.755 J2.3
NetJ2_4: J2.4 U4.41 | length 23.8
  Top Layer w0.254: v1(19.025,60.122) 19.025,59.03 20.93,57.125 21.375,57.125
  Bottom Layer w0.254: v1(19.025,60.122) 27.788,60.122 28.296,59.614 28.296,51.616 J2.4
NetJ2_5: J2.5 R1.1 | length 35.9
  Top Layer w0.254: R1.1 18.694,28.667 18.948,28.921 18.948,30.683 v1(18.771,30.861) ; v1(21.793,27.178) 23.317,28.702 v1(23.317,29.591)
  Bottom Layer w0.254: v1(18.771,30.861) 20.447,29.185 20.447,28.524 v1(21.793,27.178) ; v1(23.317,29.591) 24.613,30.886 27.432,30.886 27.889,31.344 27.889,35.865 27.432,36.322 26.162,36.322 25.705,36.779 25.705,40.894 26.213,41.402 27.432,41.402 27.889,41.859 27.889,46.491 J2.5
NetJ2_6: J2.6 R2.1 | length 30.2
  Top Layer w0.254: R2.1 20.32,28.667 20.599,28.947 20.599,31.801 22.123,33.325 24.968,33.325 24.968,38.811 23.199,40.581 19.71,40.581 19.456,40.835 19.456,42.062 20.345,42.951 24.711,42.951 J2.6
NetJ2_7: J2.7 U4.38 | length 14.9
  Top Layer w0.254: 21.375,54.575 21.777,54.575 23.975,52.377 23.975,49.985 v1(23.546,49.555)
  Bottom Layer w0.254: v1(23.546,49.555) 25.224,47.878 25.224,44.076 J2.7
NetJ2_8: J2.8 U4.37 | length 21.4
  Top Layer w0.254: v1(18.7,54) 21.073,54 21.348,53.725 ; v1(24.816,42.037) 25.603,42.037 26.8,40.84 J2.8
  Bottom Layer w0.254: v1(18.7,54) 19.99,54 22.149,51.841 22.149,49.657 24.816,46.99 v1(24.816,42.037)
NetJ2_9: J2.9 U4.36 | length 20.9
  Top Layer w0.254: 21.375,52.875 21.826,52.875 23.063,51.638 v1(23.063,50.978)
  Bottom Layer w0.254: v1(23.063,50.978) 23.868,50.978 25.823,49.022 27.838,49.022 28.296,48.565 28.296,38.916 J2.9
NetJ2_10: J2.10 U4.35 | length 19.7
  Top Layer w0.254: 21.375,52.025 21.863,52.025 22.073,51.816 22.073,49.142 22.987,48.228 v1(22.987,46.355)
  Bottom Layer w0.254: v1(22.987,46.355) 23.901,45.441 23.901,40.263 24.458,39.706 24.458,37.222 J2.10
NetJ2_11: J2.11 U4.34 | length 33.4
  Top Layer w0.254: v1(17.981,51.789) 18.175,51.983 18.958,51.983 18.969,51.994 19.401,51.994 20.22,51.175 21.375,51.175
  Bottom Layer w0.254: v1(17.981,51.789) 17.912,51.72 17.912,49.483 20.264,47.131 20.264,44.887 19.456,44.079 19.456,40.568 19.821,40.203 21.861,40.203 22.215,39.849 22.215,31.496 23.051,30.66 23.612,30.66 25.292,32.34 J2.11
NetJ2_12: J2.12 U4.33 | length 29.8
  Top Layer w0.254: v1(18.898,50.522) 21.094,50.522 21.291,50.325 21.375,50.325 ; v1(20.371,41.58) 20.371,41.125 25.448,41.125 25.603,40.97 25.603,30.997 J2.12
  Bottom Layer w0.254: v1(18.898,50.522) 18.898,49.512 20.668,47.741 20.668,44.483 20.371,44.185 v1(20.371,41.58)
NetJ2_13: J2.13 U4.32 | length 39.1
  Top Layer w0.254: v1(20.244,49.479) 20.248,49.475 21.375,49.475
  Bottom Layer w0.254: v1(20.244,49.479) 20.244,51.156 18.715,52.684 18.155,52.684 18.138,52.701 17.234,52.701 17.069,52.535 17.069,49.378 19.86,46.586 19.86,45.212 19.05,44.402 19.05,40.335 19.588,39.797 20.691,39.797 21.811,38.676 21.811,29.268 22.581,28.499 25.561,28.499 J2.13
NetJ2_14: J2.14 U4.31 | length 32.5
  Top Layer w0.254: v1(18.948,46.203) 21.387,46.203 22.098,46.914 22.098,48.158 21.631,48.625 21.375,48.625 ; v1(25.222,26.298) J2.14
  Bottom Layer w0.254: v1(18.948,46.203) 18.948,45.191 18.644,44.887 18.644,39.624 18.875,39.393 20.523,39.393 21.407,38.509 21.407,28.884 22.197,28.095 23.721,28.095 25.222,26.594 v1(25.222,26.298)
NetJ2_15: J2.15 U4.29 | length 36.3
  Top Layer w0.254: v1(18.847,50.013) 19.329,49.53 19.329,47.721 19.5,47.55 ; v1(20.853,41.986) 23.04,41.986 25.705,39.322 25.705,28.67 24.308,27.273 24.308,25.673 25.219,24.762 25.219,23.761 J2.15
  Bottom Layer w0.254: v1(18.847,50.013) 18.847,49.174 20.853,47.168 v1(20.853,41.986)
NetJ2_16: J2.16 U4.28 | length 61.5
  Top Layer w0.254: v1(14.247,50.061) 16.944,50.061 18.65,48.355 18.65,47.55
  Bottom Layer w0.254: v1(14.247,50.061) 12.695,48.509 12.695,45.141 10.714,43.159 10.714,37.536 6.216,33.038 6.216,30.074 4.412,28.27 4.412,21.941 6.793,19.56 25.289,19.56 25.368,19.64 J2.16
NetJ2_17: J2.17 U4.26 | length 42.4
  Top Layer w0.254: 16.95,47.55 16.95,46.957 v1(17.551,46.355) ; v1(18.644,39.116) 23.139,39.116 v1(23.546,38.71) ; v1(24.181,24.486) 24.765,23.901 24.765,21.107 25.248,20.625 v1(25.248,18.364)
  Bottom Layer w0.254: v1(17.551,46.355) 17.551,44.475 18.644,43.383 v1(18.644,39.116) ; v1(23.546,38.71) 23.546,35.611 25.552,33.604 27.432,33.604 27.889,33.147 27.889,26.619 27.076,25.806 25.705,25.806 24.384,24.486 v1(24.181,24.486) ; v1(25.248,18.364) 25.536,18.364 J2.17
NetJ2_18: J2.18 U4.25 | length 61
  Top Layer w0.254: v1(15.265,48.946) 16.1,48.111 16.1,47.55
  Bottom Layer w0.254: v1(15.265,48.946) 13.099,46.78 13.099,42.411 11.278,40.589 11.278,36.769 6.987,32.478 6.987,29.391 7.211,29.167 7.211,26.566 5.701,25.056 5.701,23.458 6.749,22.41 24.25,22.41 25.73,20.93 27.076,20.93 27.889,20.117 27.889,15.649 J2.18
NetQ1_1: Q1.1 R12.1 | length 6.6
  Top Layer w0.254: R12.1 4.7,34.036 4.153,34.036 4.153,35.085 4.468,35.4 Q1.1
NetQ1_2: Q1.2 R13.2 U1.24 | length 33.1
  Top Layer w0.254: Q1.2 9.639,37.3 11.201,38.862 15.723,38.862 v1(16.256,39.395) ; U1.24 14.9,31.902 15.111,32.113 16.554,32.113 v1(16.866,31.801) ; v1(19.736,38.075) 22.829,38.075 23.571,37.333 R13.2
  Bottom Layer w0.254: v1(16.256,39.395) 17.12,38.532 17.12,32.055 v1(16.866,31.801) 19.276,31.801 19.736,32.26 v1(19.736,38.075)
NetQ1_3: Q1.3 R11.2 | length 3.4
  Top Layer w0.254: R11.2 5.08,38.233 5.964,37.349 5.964,36.35 Q1.3
NetQ2_1: Q2.1 R13.1 | length 9.3
  Top Layer w0.254: Q2.1 19.939,35 19.482,35.457 19.482,36.5 19.562,36.58 21.191,36.58 21.498,36.273 23.302,36.273 23.496,36.467 R13.1
NetQ2_2: Q2.2 R12.2 U1.28 | length 31.8
  Top Layer w0.254: R12.2 9.347,34.6 9.627,34.879 9.627,35.56 10.897,36.83 13.517,36.83 13.975,36.373 13.975,35.153 16.071,35.153 16.485,35.567 ; U1.28 12.9,31.674 12.548,31.674 12.548,33.299 13.614,34.366 16.485,34.366 16.485,35.567 ; Q2.2 Q2.2@22.2,36.9 ; 16.485,35.567 16.733,35.814 16.733,36.468 17.272,37.008 ; 16.485,35.567 16.485,36.373 17.12,37.008 17.272,37.008 ; 17.272,37.008 Q2.2@21.99,37.008 ; Q2.2@21.99,37.008 22.2,37.008 Q2.2@22.2,36.9 ; Q2.2@21.99,37.008 22.098,36.9 Q2.2@22.2,36.9
NetQ2_3: Q2.3 R14.2 | length 4.7
  Top Layer w0.254: Q2.3@20.4,35.95 21.094,35.95 21.175,35.869 23.652,35.869 24.4,35.121 R14.2
NetR1_2: R1.2 U1.26 | length 8.1
  Top Layer w0.254: U1.26 13.9,31.967 14.645,32.713 17.475,32.713 17.859,32.329 17.859,30.412 18.4,29.87 R1.2
NetR2_2: R2.2 U1.25 | length 9.8
  Top Layer w0.254: U1.25 14.4,32.485 14.94,33.025 18.741,33.025 19.993,31.773 R2.2
NetR3_2: R3.2 USB1.B5 | length 13.1
  Top Layer w0.254: R3.2 9.5,11.989 10.262,12.751 v1(12.497,12.751) ; 11.03,7.475 11.03,5.967 v1(11.242,5.755)
  Bottom Layer w0.254: v1(11.242,5.755) 11.242,11.496 v1(12.497,12.751)
NetR4_2: R4.2 USB1.A5 | length 31.5
  Top Layer w0.254: 8.03,7.475 8.03,8.128 7.802,8.357 4.597,8.357 4.166,7.925 4.166,5.537 8.204,1.499 14.046,1.499 14.402,1.854 14.402,10.363 13.065,11.7 R4.2
NetR8_2: R8.2 U1.11 | length 9.9
  Top Layer w0.254: U1.11 14.4,26.01 14.629,25.781 16.281,25.781 18.465,27.965 20.523,27.965 21.006,28.447 21.006,29.261 21.311,29.566 R8.2
NetR10_2: R10.2 U1.9 | length 11.4
  Top Layer w0.254: R10.2 8.763,29.4 9.068,29.095 9.068,27.838 9.55,27.356 10.084,27.356 10.084,24.818 10.973,23.929 12.341,23.929 13.4,24.988 U1.9
NetR15_2: R15.2 USB2.B5 | length 8.6
  Top Layer w0.254: R15.2 20.481,11.566 v1(20.777,11.862) ; v1(21.463,6.147) 21.55,6.234 USB2.B5@21.55,7.487
  Bottom Layer w0.254: v1(20.777,11.862) 20.777,6.833 v1(21.463,6.147)
NetR16_2: R16.2 USB2.A5 | length 7.5
  Top Layer w0.254: 18.2,11.533 17.261,11.533 16.092,10.363 16.092,8.865 16.6,8.357 18.321,8.357 18.55,8.128 USB2.A5@18.55,7.487
NetU4_27: U4.27
NetU4_30: U4.30
NetU4_39: U4.39
NetU4_40: U4.40
VBUS: C3.1 D1.2 R7.2 USB1.A4B9 USB1.B4A9 | length 37.1
  Top Layer w0.254: v1(6.299,27.254) 6.299,29.007 6.625,29.333 R7.2 ; 6.88,7.475 6.88,6.909 9.011,4.778 11.582,4.778 12.183,5.378 12.183,6.299 11.68,6.802 11.68,7.475 11.68,8.114 11.176,8.618 10,8.618 9.881,8.738 9.881,9.2 C3.1 9.469,9.2 8.56,10.109 8.56,10.389 8.331,10.617 7.9,10.617 D1.2 7.9,11.075 8.458,11.633 8.458,13.31 8.433,13.335 8.433,20.117 v1(8.788,20.472)
  Bottom Layer w0.254: v1(6.299,27.254) 5.297,26.252 5.297,23.05 7.874,20.472 v1(8.788,20.472)
VBUSB: C7.1 D4.2 USB2.A4B9 USB2.B4A9 | length 49
  Top Layer w0.254: v1(17.018,9.652) 17.57,9.1 C7.1 ; USB2.A4B9@17.4,7.487 17.4,6.197 v1(17.882,5.715) v1(18.766,4.831) ; USB2.B4A9@22.2,7.487 22.2,6.781 v1@23.368,5.613 ; v1(23.368,5.215) v1@23.368,5.613 ; D4.2 24.6,10.566 27.686,10.566 27.889,10.363 27.889,5.994 27.508,5.613 v1@23.368,5.613
  Bottom Layer w0.254: v1(17.018,9.652) 20.14,12.774 21.35,12.774 21.535,12.589 23.657,12.589 25.502,10.744 27.432,10.744 27.889,10.287 27.889,6.172 27.432,5.715 23.663,5.715 22.779,4.831 ; v1(17.882,5.715) v1(18.766,4.831) 22.779,4.831 ; v1(23.368,5.215) 22.983,4.831 22.779,4.831
VCC_3V3: C1.2 C2.2 C4.1 C10.2 C11.2 R6.2 R10.1 R17.2 R18.2 U1.6 U1.7 U2.2 U2.4 | length 120.9
  Top Layer w0.254: R18.2 4.547,55.1 4.547,58.496 5.1,58.496 C1.2 v1(5.1,60.627) ; R17.2 v1(9.55,44.933) ; R10.1 8.5,26.8 C4.1 8.3,26.015 v1(8.687,25.629) ; v1(9.398,40.691) 10.707,42 U2.2 12.88,42 13.372,42.492 15.746,42.492 16.238,42 U2.4 ; v1(10.998,26.467) 10.998,26.797 11.601,27.4 U1.7@12.014,27.4 ; U1.7 U1.7@12.014,27.4 ; U1.6 12.014,27.9 U1.7@12.014,27.4 ; v1(12.715,37.871) 15.646,37.871 16.205,37.313 ; R6.2 15.685,35.7 16.078,36.093 16.078,37.186 16.205,37.313 ; C11.2 23.7,45.29 C10.2 23.9,47.346 24.46,47.906 24.46,52.555 22.558,54.458 22.558,57.229 23.647,58.318 C2.2@24,58.318 ; v1(24.79,56.312) 24.867,56.388 24.867,57.912 24.622,58.157 ; 16.205,37.313 17.57,38.677 U2.4 ; U2.4 17.57,43.561 17.623,43.559 21.426,43.429 24.5,43.429 25.268,44.198 25.268,53.427 24.867,53.829 24.726,56.308 24.622,58.157 ; C2.2@24,58.318 24.46,58.318 ; C2.2@24,58.318 C2.2 24.333,58.445 24.46,58.318 ; 24.46,58.318 24.622,58.157 ; 24.46,58.318 24.613,58.318 24.622,58.157
  Bottom Layer w0.254: v1(5.1,60.627) 12.497,60.627 12.774,60.35 12.774,58.457 15.03,56.202 15.879,56.202 17.307,57.63 23.472,57.63 v1(24.79,56.312) ; v1(8.687,25.629) 10.16,25.629 v1(10.998,26.467) 11.328,26.797 11.328,31.877 10.645,32.56 10.645,34.112 12.715,36.183 v1(12.715,37.871) ; v1(9.398,40.691) 9.55,40.843 v1(9.55,44.933)
VCC_5V: C8.2 C9.2 J1.21 U2.3 | length 63.2
  Top Layer w0.254: C9.2 6.4,45.237 6.096,45.237 5.842,44.983 5.842,41.63 7.772,39.7 U2.3 13.208,39.7 13.792,40.284 v1(13.792,41.58) ; v1(7.544,12.404) 7.618,12.478 7.618,30.173 v1(7.899,30.455) ; v1(14.224,44.605) 14.605,44.986 19.9,44.986 C8.2
  Bottom Layer w0.254: J1.21 v1(7.544,12.404) ; v1(7.899,30.455) 7.899,32.706 11.74,36.546 11.74,39.527 v1(13.792,41.58) 13.792,44.173 v1(14.224,44.605)
pads on no net: J2.1 J2.21 J2.22 SW1.2 SW1.4 SW2.2 SW2.4 U1.1 U1.2 U1.10 U1.12 U1.13 U1.14 U1.15 U1.16 U1.17 U1.18 U1.19 U1.20 U1.21 U1.22 U1.23 U1.27 U4.GND USB1.1 USB1.A8 USB1.B8 USB2.1 USB2.A8 USB2.B8
copper on no net: | length 183.5
  Top Layer w0.254: 0,0 28.902,0 29.051,0.149 29.051,62.651 28.902,62.8 0,62.8 0,0